# EAGLE board povsheild4x8 (EAGLE 6.5.0), part 1 of 6
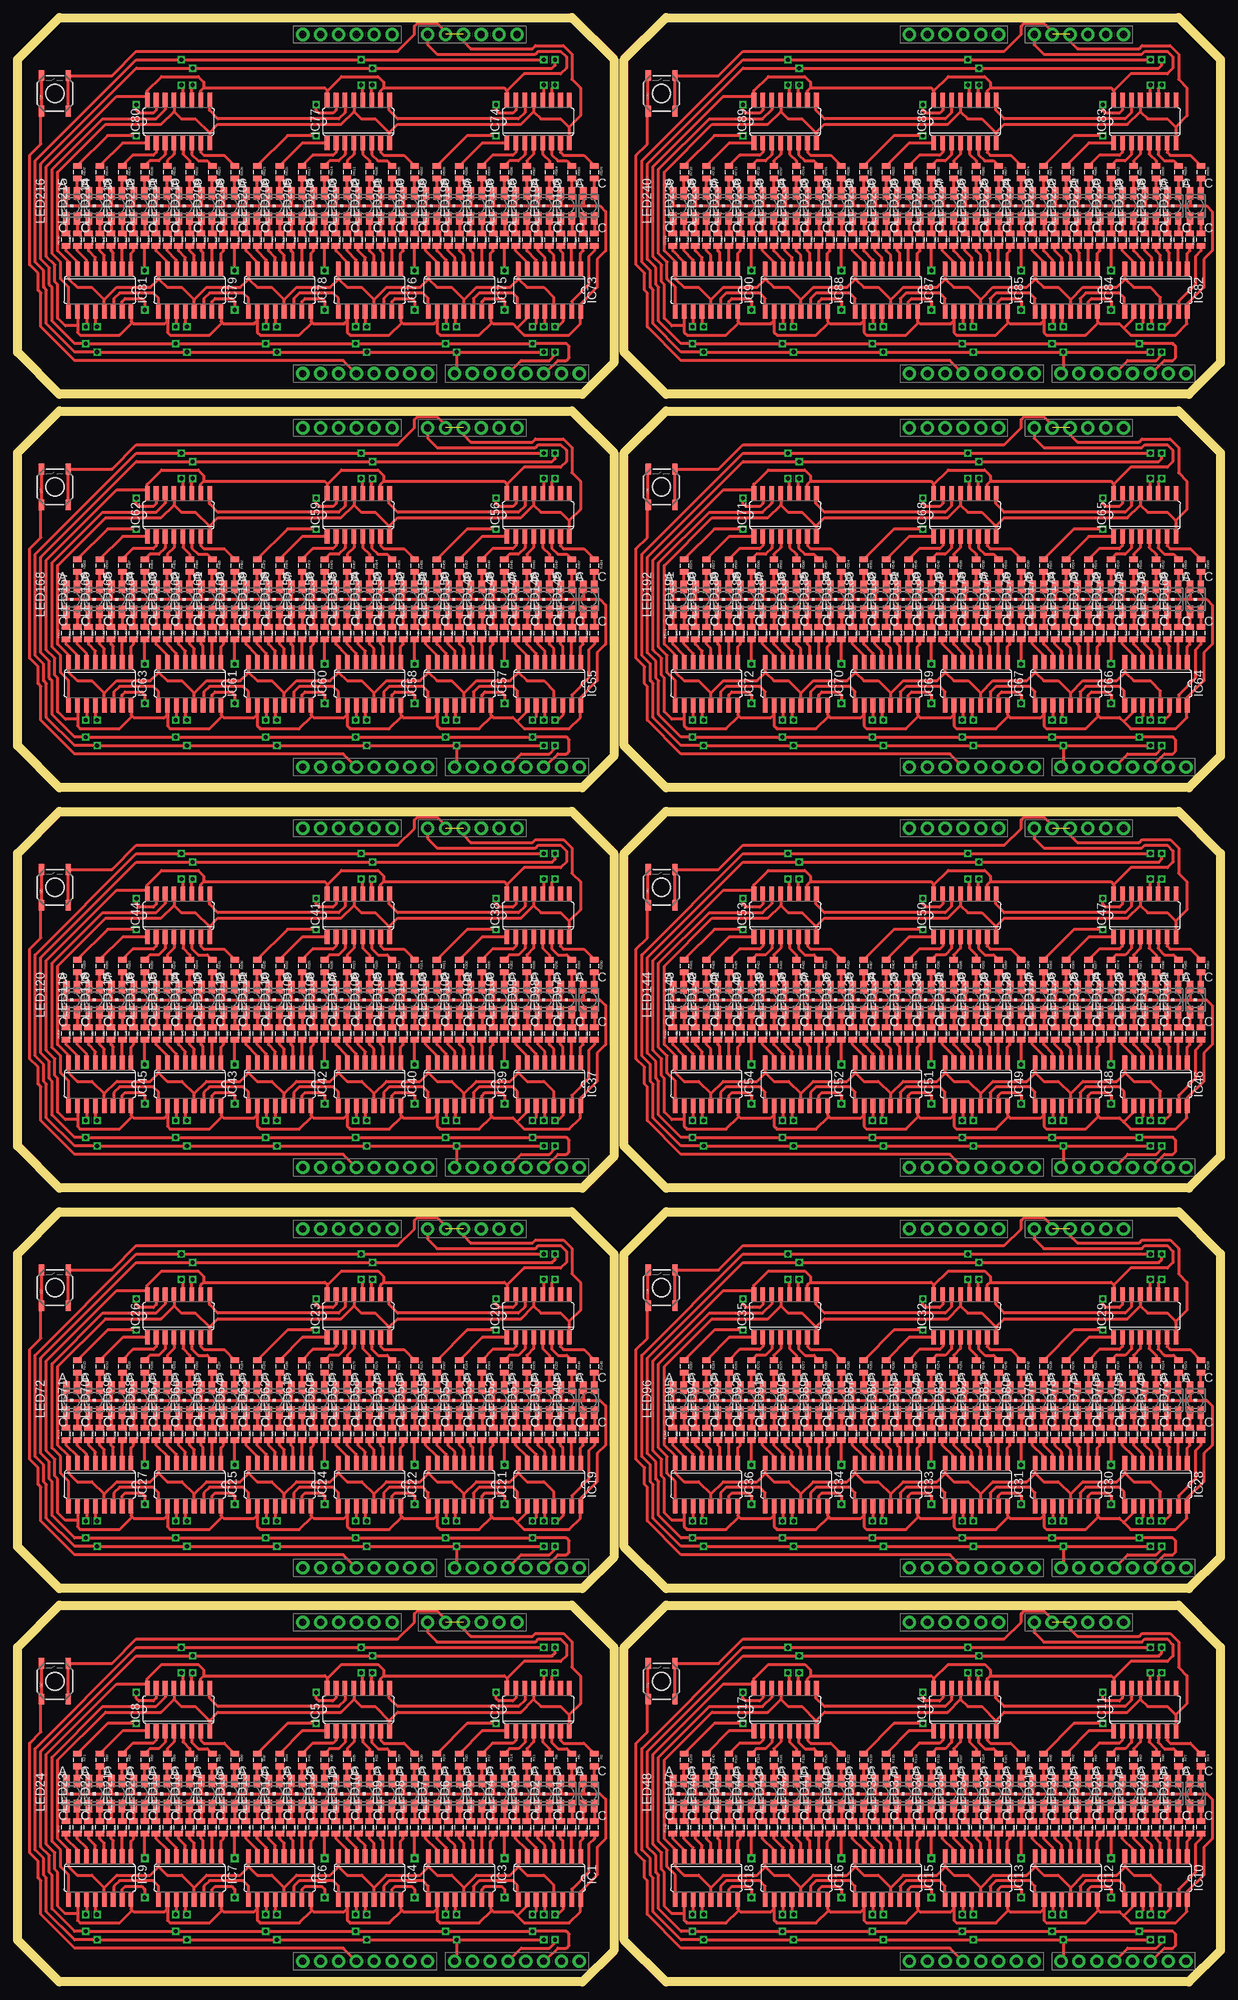
[diagram p0: board, top side]
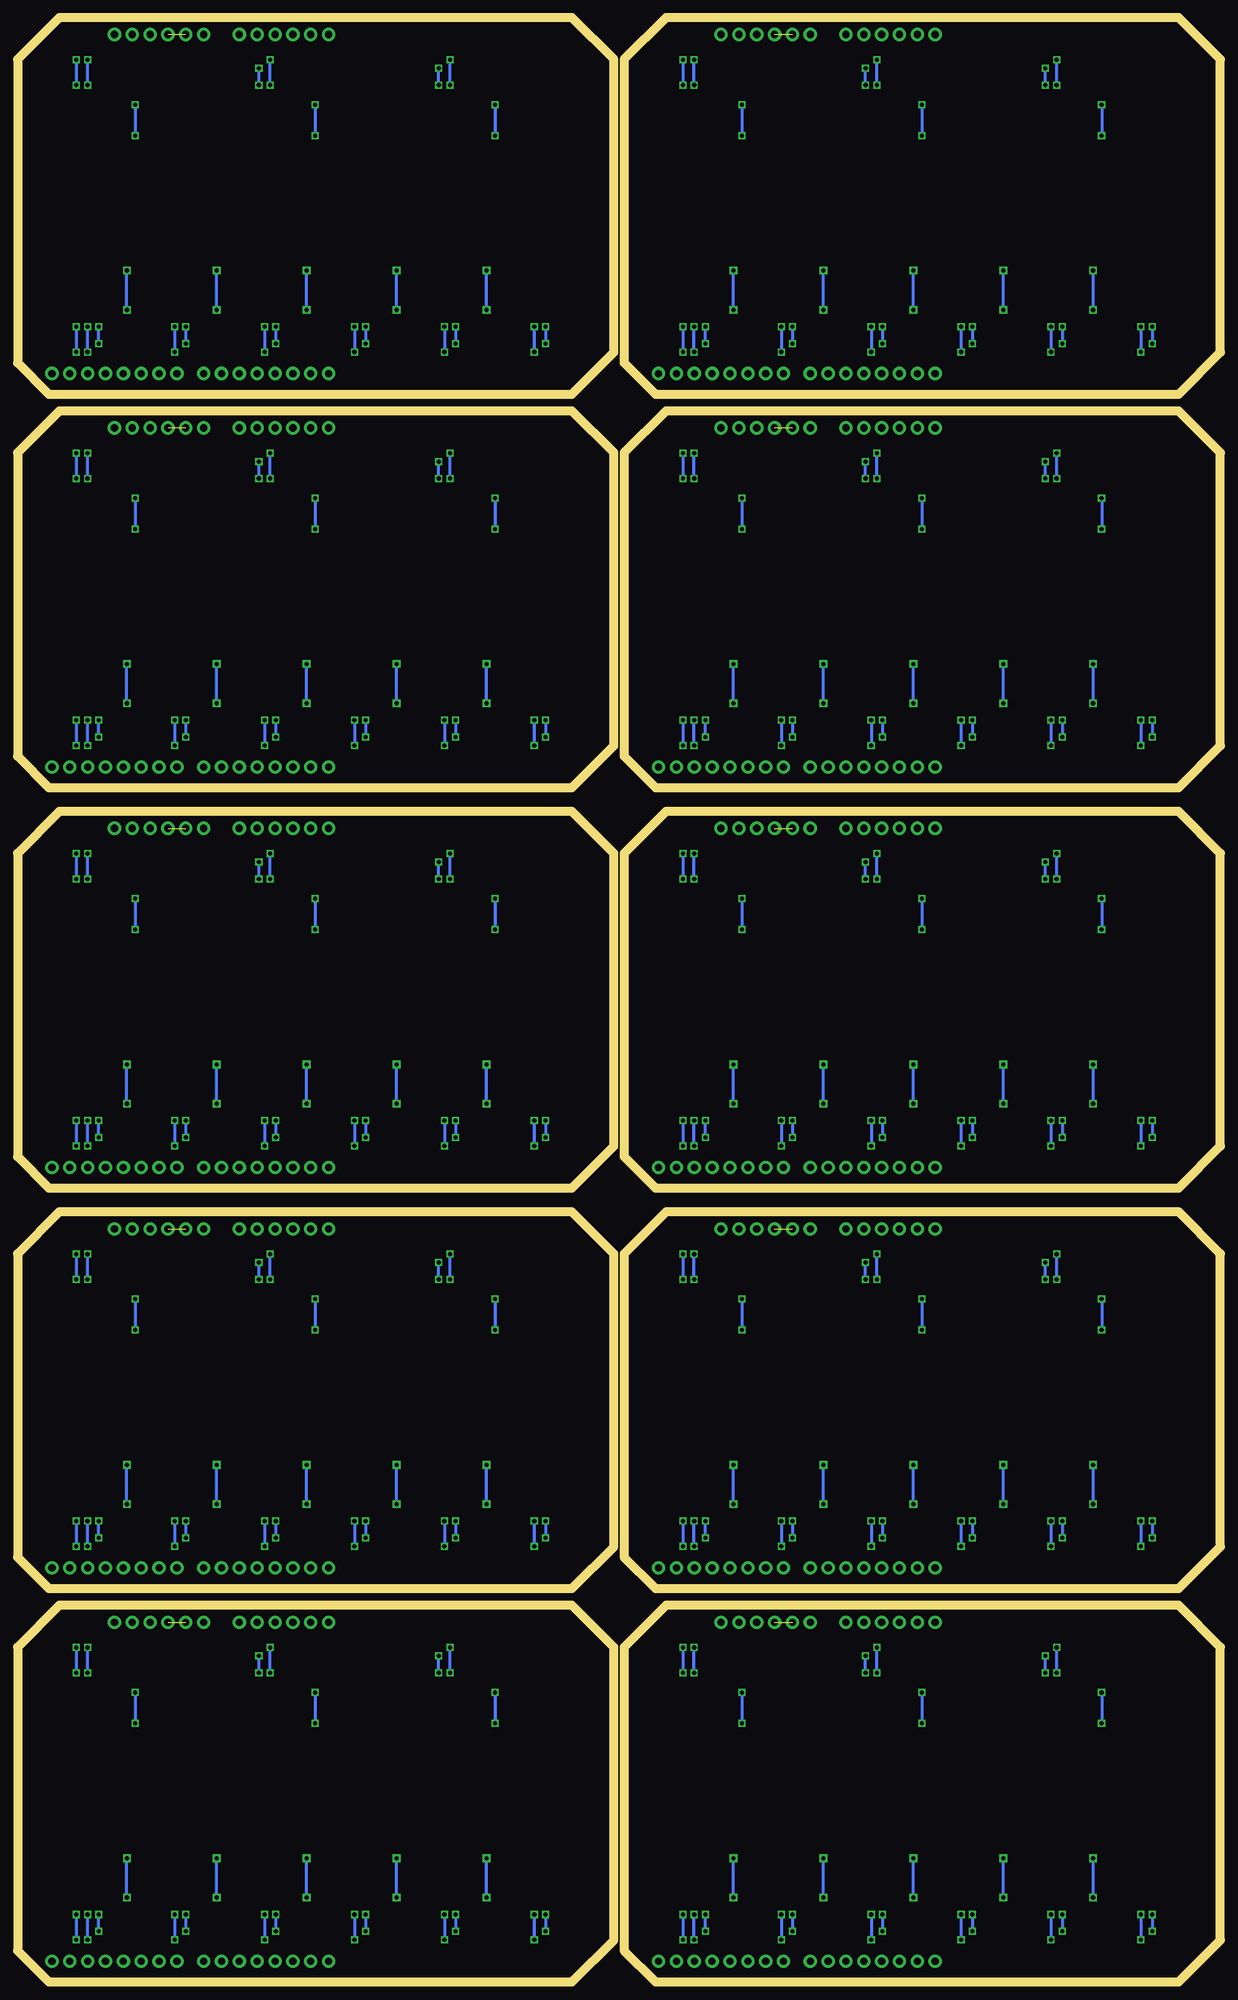
[diagram p1: board, bottom side, seen from below]

Size 171.23 x 279.6 mm. Coordinates in mm from the lower left corner, seen from the top.
Outline: 0,47.65 5.96,53.6 78.92,53.6 84.88,47.65 84.88,26.8 84.88,4.47 80.41,0 5.96,0 0,5.96 0,26.8 0,47.65
Outline: 86.36,47.65 92.32,53.6 165.28,53.6 171.23,47.65 171.23,26.8 171.23,4.47 166.77,0 92.32,0 86.36,5.96 86.36,26.8 86.36,47.65
Outline: 0,103.65 5.96,109.6 78.92,109.6 84.88,103.65 84.88,82.8 84.88,60.47 80.41,56 5.96,56 0,61.96 0,82.8 0,103.65
Outline: 86.36,103.65 92.32,109.6 165.28,109.6 171.23,103.65 171.23,82.8 171.23,60.47 166.77,56 92.32,56 86.36,61.96 86.36,82.8 86.36,103.65
Outline: 0,160.65 5.96,166.6 78.92,166.6 84.88,160.65 84.88,139.8 84.88,117.47 80.41,113 5.96,113 0,118.96 0,139.8 0,160.65
Outline: 86.36,160.65 92.32,166.6 165.28,166.6 171.23,160.65 171.23,139.8 171.23,117.47 166.77,113 92.32,113 86.36,118.96 86.36,139.8 86.36,160.65
Outline: 0,217.65 5.96,223.6 78.92,223.6 84.88,217.65 84.88,196.8 84.88,174.47 80.41,170 5.96,170 0,175.96 0,196.8 0,217.65
Outline: 86.36,217.65 92.32,223.6 165.28,223.6 171.23,217.65 171.23,196.8 171.23,174.47 166.77,170 92.32,170 86.36,175.96 86.36,196.8 86.36,217.65
Outline: 0,273.65 5.96,279.6 78.92,279.6 84.88,273.65 84.88,252.8 84.88,230.47 80.41,226 5.96,226 0,231.96 0,252.8 0,273.65
Outline: 86.36,273.65 92.32,279.6 165.28,279.6 171.23,273.65 171.23,252.8 171.23,230.47 166.77,226 92.32,226 86.36,231.96 86.36,252.8 86.36,273.65
Copper layers (1*16): Top 0.035mm / dielectric 1.5mm / Bottom 0.035mm
Design rules "default": minimum track width 10mil, minimum drill 24mil, track to track 8mil, track to pad 8mil, pad to pad 8mil, via to via 8mil, smd to smd 8mil, copper to edge 40mil, drill to drill 8mil, minimum pad ring 10mil, minimum via ring 8mil, stop-mask expansion 4mil, vias tented up to drill 0mil, thermal gap 10mil
Milling: 80 lines

## Footprints (pad centres in the part's own frame; a part is rotated, then mirrored left to right if it is on the bottom)
SO16 = smd 0.66 x 2.032: 1 -4.445,-3.073; 2 -3.175,-3.073; 3 -1.905,-3.073; 4 -0.635,-3.073; 5 0.635,-3.073; 6 1.905,-3.073; 7 3.175,-3.073; 8 4.445,-3.073; 9 4.445,3.073; 10 3.175,3.073; 11 1.905,3.073; 12 0.635,3.073; 13 -0.635,3.073; 14 -1.905,3.073; 15 -3.175,3.073; 16 -4.445,3.073
P-LCC-4 = smd 0.914 x 1.778: A -0.762,1.778; C@1 -0.762,-1.778; C@3 0.762,1.778; C@4 0.762,-1.778
0805 = smd 0.8 x 1.2: 1 -0.9,0; 2 0.9,0
TACTILE_SWITCH_SMD = smd 1.524 x 0.762: 1 -2.54,1.905; 2 2.54,1.905; 3 -2.54,-1.905; 4 2.54,-1.905
DUEMILANOVE_VIAS = drill 1.016 pad 1.88: 3.3V 50.8,13.97; 5V 50.8,16.51; A0 50.8,29.21; A1 50.8,31.75; A2 50.8,34.29; A3 50.8,36.83; A4 50.8,39.37; A5 50.8,41.91; AREF 2.54,2.54; D2 2.54,36.83; D3 2.54,34.29; D4 2.54,31.75; D5 2.54,29.21; D6 2.54,26.67; D7 2.54,24.13; D8 2.54,20.32; D9 2.54,17.78; D10 2.54,15.24; D11 2.54,12.7; D12 2.54,10.16; D13 2.54,7.62; GND@0 50.8,19.05; GND@1 50.8,21.59; GND@2 2.54,5.08; RES 50.8,11.43; RX 2.54,41.91; TX 2.54,39.37; VIN 50.8,24.13

## Placement (x,y rotation side)
IC1  74HC595D  [SO16]  75.72,14.8 180 top
IC2  74HC595D  [SO16]  74.12,38.8 0 top
IC3  74HC595D  [SO16]  62.91,14.8 180 top
IC4  74HC595D  [SO16]  50.11,14.8 180 top
IC5  74HC595D  [SO16]  48.51,38.8 0 top
IC6  74HC595D  [SO16]  37.31,14.8 180 top
IC7  74HC595D  [SO16]  24.52,14.8 180 top
IC8  74HC595D  [SO16]  22.91,38.8 0 top
IC9  74HC595D  [SO16]  11.71,14.8 180 top
IC10  74HC595D  [SO16]  162.07,14.8 180 top
IC11  74HC595D  [SO16]  160.47,38.8 0 top
IC12  74HC595D  [SO16]  149.27,14.8 180 top
IC13  74HC595D  [SO16]  136.47,14.8 180 top
IC14  74HC595D  [SO16]  134.88,38.8 0 top
IC15  74HC595D  [SO16]  123.67,14.8 180 top
IC16  74HC595D  [SO16]  110.88,14.8 180 top
IC17  74HC595D  [SO16]  109.28,38.8 0 top
IC18  74HC595D  [SO16]  98.08,14.8 180 top
IC19  74HC595D  [SO16]  75.72,70.8 180 top
IC20  74HC595D  [SO16]  74.12,94.8 0 top
IC21  74HC595D  [SO16]  62.91,70.8 180 top
IC22  74HC595D  [SO16]  50.11,70.8 180 top
IC23  74HC595D  [SO16]  48.51,94.8 0 top
IC24  74HC595D  [SO16]  37.31,70.8 180 top
IC25  74HC595D  [SO16]  24.52,70.8 180 top
IC26  74HC595D  [SO16]  22.91,94.8 0 top
IC27  74HC595D  [SO16]  11.71,70.8 180 top
IC28  74HC595D  [SO16]  162.07,70.8 180 top
IC29  74HC595D  [SO16]  160.47,94.8 0 top
IC30  74HC595D  [SO16]  149.27,70.8 180 top
IC31  74HC595D  [SO16]  136.47,70.8 180 top
IC32  74HC595D  [SO16]  134.88,94.8 0 top
IC33  74HC595D  [SO16]  123.67,70.8 180 top
IC34  74HC595D  [SO16]  110.88,70.8 180 top
IC35  74HC595D  [SO16]  109.28,94.8 0 top
IC36  74HC595D  [SO16]  98.08,70.8 180 top
IC37  74HC595D  [SO16]  75.72,127.8 180 top
IC38  74HC595D  [SO16]  74.12,151.8 0 top
IC39  74HC595D  [SO16]  62.91,127.8 180 top
IC40  74HC595D  [SO16]  50.11,127.8 180 top
IC41  74HC595D  [SO16]  48.51,151.8 0 top
IC42  74HC595D  [SO16]  37.31,127.8 180 top
IC43  74HC595D  [SO16]  24.52,127.8 180 top
IC44  74HC595D  [SO16]  22.91,151.8 0 top
IC45  74HC595D  [SO16]  11.71,127.8 180 top
IC46  74HC595D  [SO16]  162.07,127.8 180 top
IC47  74HC595D  [SO16]  160.47,151.8 0 top
IC48  74HC595D  [SO16]  149.27,127.8 180 top
IC49  74HC595D  [SO16]  136.47,127.8 180 top
IC50  74HC595D  [SO16]  134.88,151.8 0 top
IC51  74HC595D  [SO16]  123.67,127.8 180 top
IC52  74HC595D  [SO16]  110.88,127.8 180 top
IC53  74HC595D  [SO16]  109.28,151.8 0 top
IC54  74HC595D  [SO16]  98.08,127.8 180 top
IC55  74HC595D  [SO16]  75.72,184.8 180 top
IC56  74HC595D  [SO16]  74.12,208.8 0 top
IC57  74HC595D  [SO16]  62.91,184.8 180 top
IC58  74HC595D  [SO16]  50.11,184.8 180 top
IC59  74HC595D  [SO16]  48.51,208.8 0 top
IC60  74HC595D  [SO16]  37.31,184.8 180 top
IC61  74HC595D  [SO16]  24.52,184.8 180 top
IC62  74HC595D  [SO16]  22.91,208.8 0 top
IC63  74HC595D  [SO16]  11.71,184.8 180 top
IC64  74HC595D  [SO16]  162.07,184.8 180 top
IC65  74HC595D  [SO16]  160.47,208.8 0 top
IC66  74HC595D  [SO16]  149.27,184.8 180 top
IC67  74HC595D  [SO16]  136.47,184.8 180 top
IC68  74HC595D  [SO16]  134.88,208.8 0 top
IC69  74HC595D  [SO16]  123.67,184.8 180 top
IC70  74HC595D  [SO16]  110.88,184.8 180 top
IC71  74HC595D  [SO16]  109.28,208.8 0 top
IC72  74HC595D  [SO16]  98.08,184.8 180 top
IC73  74HC595D  [SO16]  75.72,240.8 180 top
IC74  74HC595D  [SO16]  74.12,264.8 0 top
IC75  74HC595D  [SO16]  62.91,240.8 180 top
IC76  74HC595D  [SO16]  50.11,240.8 180 top
IC77  74HC595D  [SO16]  48.51,264.8 0 top
IC78  74HC595D  [SO16]  37.31,240.8 180 top
IC79  74HC595D  [SO16]  24.52,240.8 180 top
IC80  74HC595D  [SO16]  22.91,264.8 0 top
IC81  74HC595D  [SO16]  11.71,240.8 180 top
IC82  74HC595D  [SO16]  162.07,240.8 180 top
IC83  74HC595D  [SO16]  160.47,264.8 0 top
IC84  74HC595D  [SO16]  149.27,240.8 180 top
IC85  74HC595D  [SO16]  136.47,240.8 180 top
IC86  74HC595D  [SO16]  134.88,264.8 0 top
IC87  74HC595D  [SO16]  123.67,240.8 180 top
IC88  74HC595D  [SO16]  110.88,240.8 180 top
IC89  74HC595D  [SO16]  109.28,264.8 0 top
IC90  74HC595D  [SO16]  98.08,240.8 180 top
LED1  [P-LCC-4]  81.31,26.8 0 top
LED2  [P-LCC-4]  78.12,26.8 0 top
LED3  [P-LCC-4]  74.92,26.8 0 top
LED4  [P-LCC-4]  71.72,26.8 0 top
LED5  [P-LCC-4]  68.52,26.8 0 top
LED6  [P-LCC-4]  65.31,26.8 0 top
LED7  [P-LCC-4]  62.11,26.8 0 top
LED8  [P-LCC-4]  58.91,26.8 0 top
LED9  [P-LCC-4]  55.71,26.8 0 top
LED10  [P-LCC-4]  52.51,26.8 0 top
LED11  [P-LCC-4]  49.31,26.8 0 top
LED12  [P-LCC-4]  46.11,26.8 0 top
LED13  [P-LCC-4]  42.91,26.8 0 top
LED14  [P-LCC-4]  39.71,26.8 0 top
LED15  [P-LCC-4]  36.51,26.8 0 top
LED16  [P-LCC-4]  33.31,26.8 0 top
LED17  [P-LCC-4]  30.12,26.8 0 top
LED18  [P-LCC-4]  26.91,26.8 0 top
LED19  [P-LCC-4]  23.71,26.8 0 top
LED20  [P-LCC-4]  20.52,26.8 0 top
LED21  [P-LCC-4]  17.32,26.8 0 top
LED22  [P-LCC-4]  14.12,26.8 0 top
LED23  [P-LCC-4]  10.92,26.8 0 top
LED24  [P-LCC-4]  7.71,26.8 0 top
LED25  [P-LCC-4]  167.67,26.8 0 top
LED26  [P-LCC-4]  164.47,26.8 0 top
LED27  [P-LCC-4]  161.27,26.8 0 top
LED28  [P-LCC-4]  158.07,26.8 0 top
LED29  [P-LCC-4]  154.88,26.8 0 top
LED30  [P-LCC-4]  151.67,26.8 0 top
LED31  [P-LCC-4]  148.47,26.8 0 top
LED32  [P-LCC-4]  145.27,26.8 0 top
LED33  [P-LCC-4]  142.07,26.8 0 top
LED34  [P-LCC-4]  138.88,26.8 0 top
LED35  [P-LCC-4]  135.67,26.8 0 top
LED36  [P-LCC-4]  132.47,26.8 0 top
LED37  [P-LCC-4]  129.27,26.8 0 top
LED38  [P-LCC-4]  126.08,26.8 0 top
LED39  [P-LCC-4]  122.88,26.8 0 top
LED40  [P-LCC-4]  119.67,26.8 0 top
LED41  [P-LCC-4]  116.48,26.8 0 top
LED42  [P-LCC-4]  113.28,26.8 0 top
LED43  [P-LCC-4]  110.08,26.8 0 top
LED44  [P-LCC-4]  106.88,26.8 0 top
LED45  [P-LCC-4]  103.67,26.8 0 top
LED46  [P-LCC-4]  100.48,26.8 0 top
LED47  [P-LCC-4]  97.28,26.8 0 top
LED48  [P-LCC-4]  94.08,26.8 0 top
LED49  [P-LCC-4]  81.31,82.8 0 top
LED50  [P-LCC-4]  78.12,82.8 0 top
LED51  [P-LCC-4]  74.92,82.8 0 top
LED52  [P-LCC-4]  71.72,82.8 0 top
LED53  [P-LCC-4]  68.52,82.8 0 top
LED54  [P-LCC-4]  65.31,82.8 0 top
LED55  [P-LCC-4]  62.11,82.8 0 top
LED56  [P-LCC-4]  58.91,82.8 0 top
LED57  [P-LCC-4]  55.71,82.8 0 top
LED58  [P-LCC-4]  52.51,82.8 0 top
LED59  [P-LCC-4]  49.31,82.8 0 top
LED60  [P-LCC-4]  46.11,82.8 0 top
LED61  [P-LCC-4]  42.91,82.8 0 top
LED62  [P-LCC-4]  39.71,82.8 0 top
LED63  [P-LCC-4]  36.51,82.8 0 top
LED64  [P-LCC-4]  33.31,82.8 0 top
LED65  [P-LCC-4]  30.12,82.8 0 top
LED66  [P-LCC-4]  26.91,82.8 0 top
LED67  [P-LCC-4]  23.71,82.8 0 top
LED68  [P-LCC-4]  20.52,82.8 0 top
LED69  [P-LCC-4]  17.32,82.8 0 top
LED70  [P-LCC-4]  14.12,82.8 0 top
LED71  [P-LCC-4]  10.92,82.8 0 top
LED72  [P-LCC-4]  7.71,82.8 0 top
LED73  [P-LCC-4]  167.67,82.8 0 top
LED74  [P-LCC-4]  164.47,82.8 0 top
LED75  [P-LCC-4]  161.27,82.8 0 top
LED76  [P-LCC-4]  158.07,82.8 0 top
LED77  [P-LCC-4]  154.88,82.8 0 top
LED78  [P-LCC-4]  151.67,82.8 0 top
LED79  [P-LCC-4]  148.47,82.8 0 top
LED80  [P-LCC-4]  145.27,82.8 0 top
LED81  [P-LCC-4]  142.07,82.8 0 top
LED82  [P-LCC-4]  138.88,82.8 0 top
LED83  [P-LCC-4]  135.67,82.8 0 top
LED84  [P-LCC-4]  132.47,82.8 0 top
LED85  [P-LCC-4]  129.27,82.8 0 top
LED86  [P-LCC-4]  126.08,82.8 0 top
LED87  [P-LCC-4]  122.88,82.8 0 top
LED88  [P-LCC-4]  119.67,82.8 0 top
LED89  [P-LCC-4]  116.48,82.8 0 top
LED90  [P-LCC-4]  113.28,82.8 0 top
LED91  [P-LCC-4]  110.08,82.8 0 top
LED92  [P-LCC-4]  106.88,82.8 0 top
LED93  [P-LCC-4]  103.67,82.8 0 top
LED94  [P-LCC-4]  100.48,82.8 0 top
LED95  [P-LCC-4]  97.28,82.8 0 top
LED96  [P-LCC-4]  94.08,82.8 0 top
LED97  [P-LCC-4]  81.31,139.8 0 top
LED98  [P-LCC-4]  78.12,139.8 0 top
LED99  [P-LCC-4]  74.92,139.8 0 top
LED100  [P-LCC-4]  71.72,139.8 0 top
LED101  [P-LCC-4]  68.52,139.8 0 top
LED102  [P-LCC-4]  65.31,139.8 0 top
LED103  [P-LCC-4]  62.11,139.8 0 top
LED104  [P-LCC-4]  58.91,139.8 0 top
LED105  [P-LCC-4]  55.71,139.8 0 top
LED106  [P-LCC-4]  52.51,139.8 0 top
LED107  [P-LCC-4]  49.31,139.8 0 top
LED108  [P-LCC-4]  46.11,139.8 0 top
LED109  [P-LCC-4]  42.91,139.8 0 top
LED110  [P-LCC-4]  39.71,139.8 0 top
LED111  [P-LCC-4]  36.51,139.8 0 top
LED112  [P-LCC-4]  33.31,139.8 0 top
LED113  [P-LCC-4]  30.12,139.8 0 top
LED114  [P-LCC-4]  26.91,139.8 0 top
LED115  [P-LCC-4]  23.71,139.8 0 top
LED116  [P-LCC-4]  20.52,139.8 0 top
LED117  [P-LCC-4]  17.32,139.8 0 top
LED118  [P-LCC-4]  14.12,139.8 0 top
LED119  [P-LCC-4]  10.92,139.8 0 top
LED120  [P-LCC-4]  7.71,139.8 0 top
LED121  [P-LCC-4]  167.67,139.8 0 top
LED122  [P-LCC-4]  164.47,139.8 0 top
LED123  [P-LCC-4]  161.27,139.8 0 top
LED124  [P-LCC-4]  158.07,139.8 0 top
LED125  [P-LCC-4]  154.88,139.8 0 top
LED126  [P-LCC-4]  151.67,139.8 0 top
LED127  [P-LCC-4]  148.47,139.8 0 top
LED128  [P-LCC-4]  145.27,139.8 0 top
LED129  [P-LCC-4]  142.07,139.8 0 top
LED130  [P-LCC-4]  138.88,139.8 0 top
LED131  [P-LCC-4]  135.67,139.8 0 top
LED132  [P-LCC-4]  132.47,139.8 0 top
LED133  [P-LCC-4]  129.27,139.8 0 top
LED134  [P-LCC-4]  126.08,139.8 0 top
LED135  [P-LCC-4]  122.88,139.8 0 top
LED136  [P-LCC-4]  119.67,139.8 0 top
LED137  [P-LCC-4]  116.48,139.8 0 top
LED138  [P-LCC-4]  113.28,139.8 0 top
LED139  [P-LCC-4]  110.08,139.8 0 top
LED140  [P-LCC-4]  106.88,139.8 0 top
LED141  [P-LCC-4]  103.67,139.8 0 top
LED142  [P-LCC-4]  100.48,139.8 0 top
LED143  [P-LCC-4]  97.28,139.8 0 top
LED144  [P-LCC-4]  94.08,139.8 0 top
LED145  [P-LCC-4]  81.31,196.8 0 top
LED146  [P-LCC-4]  78.12,196.8 0 top
LED147  [P-LCC-4]  74.92,196.8 0 top
LED148  [P-LCC-4]  71.72,196.8 0 top
LED149  [P-LCC-4]  68.52,196.8 0 top
LED150  [P-LCC-4]  65.31,196.8 0 top
LED151  [P-LCC-4]  62.11,196.8 0 top
LED152  [P-LCC-4]  58.91,196.8 0 top
LED153  [P-LCC-4]  55.71,196.8 0 top
LED154  [P-LCC-4]  52.51,196.8 0 top
LED155  [P-LCC-4]  49.31,196.8 0 top
LED156  [P-LCC-4]  46.11,196.8 0 top
LED157  [P-LCC-4]  42.91,196.8 0 top
LED158  [P-LCC-4]  39.71,196.8 0 top
LED159  [P-LCC-4]  36.51,196.8 0 top
LED160  [P-LCC-4]  33.31,196.8 0 top
LED161  [P-LCC-4]  30.12,196.8 0 top
LED162  [P-LCC-4]  26.91,196.8 0 top
LED163  [P-LCC-4]  23.71,196.8 0 top
LED164  [P-LCC-4]  20.52,196.8 0 top
LED165  [P-LCC-4]  17.32,196.8 0 top
LED166  [P-LCC-4]  14.12,196.8 0 top
LED167  [P-LCC-4]  10.92,196.8 0 top
LED168  [P-LCC-4]  7.71,196.8 0 top
LED169  [P-LCC-4]  167.67,196.8 0 top
LED170  [P-LCC-4]  164.47,196.8 0 top
LED171  [P-LCC-4]  161.27,196.8 0 top
LED172  [P-LCC-4]  158.07,196.8 0 top
LED173  [P-LCC-4]  154.88,196.8 0 top
LED174  [P-LCC-4]  151.67,196.8 0 top
LED175  [P-LCC-4]  148.47,196.8 0 top
LED176  [P-LCC-4]  145.27,196.8 0 top
LED177  [P-LCC-4]  142.07,196.8 0 top
LED178  [P-LCC-4]  138.88,196.8 0 top
LED179  [P-LCC-4]  135.67,196.8 0 top
LED180  [P-LCC-4]  132.47,196.8 0 top
LED181  [P-LCC-4]  129.27,196.8 0 top
LED182  [P-LCC-4]  126.08,196.8 0 top
LED183  [P-LCC-4]  122.88,196.8 0 top
LED184  [P-LCC-4]  119.67,196.8 0 top
LED185  [P-LCC-4]  116.48,196.8 0 top
LED186  [P-LCC-4]  113.28,196.8 0 top
LED187  [P-LCC-4]  110.08,196.8 0 top
LED188  [P-LCC-4]  106.88,196.8 0 top
LED189  [P-LCC-4]  103.67,196.8 0 top
LED190  [P-LCC-4]  100.48,196.8 0 top
LED191  [P-LCC-4]  97.28,196.8 0 top
LED192  [P-LCC-4]  94.08,196.8 0 top
LED193  [P-LCC-4]  81.31,252.8 0 top
LED194  [P-LCC-4]  78.12,252.8 0 top
LED195  [P-LCC-4]  74.92,252.8 0 top
LED196  [P-LCC-4]  71.72,252.8 0 top
LED197  [P-LCC-4]  68.52,252.8 0 top
LED198  [P-LCC-4]  65.31,252.8 0 top
LED199  [P-LCC-4]  62.11,252.8 0 top
LED200  [P-LCC-4]  58.91,252.8 0 top
LED201  [P-LCC-4]  55.71,252.8 0 top
LED202  [P-LCC-4]  52.51,252.8 0 top
LED203  [P-LCC-4]  49.31,252.8 0 top
LED204  [P-LCC-4]  46.11,252.8 0 top
LED205  [P-LCC-4]  42.91,252.8 0 top
LED206  [P-LCC-4]  39.71,252.8 0 top
LED207  [P-LCC-4]  36.51,252.8 0 top
LED208  [P-LCC-4]  33.31,252.8 0 top
LED209  [P-LCC-4]  30.12,252.8 0 top
LED210  [P-LCC-4]  26.91,252.8 0 top
LED211  [P-LCC-4]  23.71,252.8 0 top
LED212  [P-LCC-4]  20.52,252.8 0 top
LED213  [P-LCC-4]  17.32,252.8 0 top
LED214  [P-LCC-4]  14.12,252.8 0 top
LED215  [P-LCC-4]  10.92,252.8 0 top
LED216  [P-LCC-4]  7.71,252.8 0 top
LED217  [P-LCC-4]  167.67,252.8 0 top
LED218  [P-LCC-4]  164.47,252.8 0 top
LED219  [P-LCC-4]  161.27,252.8 0 top
LED220  [P-LCC-4]  158.07,252.8 0 top
LED221  [P-LCC-4]  154.88,252.8 0 top
LED222  [P-LCC-4]  151.67,252.8 0 top
LED223  [P-LCC-4]  148.47,252.8 0 top
LED224  [P-LCC-4]  145.27,252.8 0 top
LED225  [P-LCC-4]  142.07,252.8 0 top
LED226  [P-LCC-4]  138.88,252.8 0 top
LED227  [P-LCC-4]  135.67,252.8 0 top
LED228  [P-LCC-4]  132.47,252.8 0 top
LED229  [P-LCC-4]  129.27,252.8 0 top
LED230  [P-LCC-4]  126.08,252.8 0 top
LED231  [P-LCC-4]  122.88,252.8 0 top
LED232  [P-LCC-4]  119.67,252.8 0 top
LED233  [P-LCC-4]  116.48,252.8 0 top
LED234  [P-LCC-4]  113.28,252.8 0 top
LED235  [P-LCC-4]  110.08,252.8 0 top
LED236  [P-LCC-4]  106.88,252.8 0 top
LED237  [P-LCC-4]  103.67,252.8 0 top
LED238  [P-LCC-4]  100.48,252.8 0 top
LED239  [P-LCC-4]  97.28,252.8 0 top
LED240  [P-LCC-4]  94.08,252.8 0 top
R1  [0805]  80.52,22 90 top
R2  [0805]  82.12,31.6 270 top
R3  [0805]  82.12,22 90 top
R4  [0805]  77.31,22 90 top
R5  [0805]  78.92,31.6 270 top
R6  [0805]  78.92,22 90 top
R7  [0805]  74.12,22 90 top
R8  [0805]  75.72,31.6 270 top
R9  [0805]  75.72,22 90 top
R10  [0805]  70.92,22 90 top
R11  [0805]  72.52,31.6 270 top
R12  [0805]  72.52,22 90 top
R13  [0805]  67.72,22 90 top
R14  [0805]  69.31,31.6 270 top
R15  [0805]  69.31,22 90 top
R16  [0805]  64.52,22 90 top
R17  [0805]  66.12,31.6 270 top
R18  [0805]  66.12,22 90 top
R19  [0805]  61.31,22 90 top
R20  [0805]  62.91,31.6 270 top
R21  [0805]  62.91,22 90 top
R22  [0805]  58.11,22 90 top
R23  [0805]  59.71,31.6 270 top
R24  [0805]  59.71,22 90 top
R25  [0805]  54.91,22 90 top
R26  [0805]  56.51,31.6 270 top
R27  [0805]  56.51,22 90 top
R28  [0805]  51.71,22 90 top
R29  [0805]  53.31,31.6 270 top
R30  [0805]  53.31,22 90 top
R31  [0805]  48.51,22 90 top
R32  [0805]  50.11,31.6 270 top
R33  [0805]  50.11,22 90 top
R34  [0805]  45.31,22 90 top
R35  [0805]  46.91,31.6 270 top
R36  [0805]  46.91,22 90 top
R37  [0805]  42.11,22 90 top
R38  [0805]  43.71,31.6 270 top
R39  [0805]  43.71,22 90 top
R40  [0805]  38.91,22 90 top
R41  [0805]  40.51,31.6 270 top
R42  [0805]  40.51,22 90 top
R43  [0805]  35.71,22 90 top
R44  [0805]  37.31,31.6 270 top
R45  [0805]  37.31,22 90 top
R46  [0805]  32.51,22 90 top
R47  [0805]  34.11,31.6 270 top
R48  [0805]  34.11,22 90 top
R49  [0805]  29.32,22 90 top
R50  [0805]  30.92,31.6 270 top
R51  [0805]  30.92,22 90 top
R52  [0805]  26.12,22 90 top
R53  [0805]  27.71,31.6 270 top
R54  [0805]  27.71,22 90 top
R55  [0805]  22.91,22 90 top
R56  [0805]  24.52,31.6 270 top
R57  [0805]  24.52,22 90 top
R58  [0805]  19.71,22 90 top
R59  [0805]  21.32,31.6 270 top
R60  [0805]  21.32,22 90 top
R61  [0805]  16.52,22 90 top
R62  [0805]  18.12,31.6 270 top
R63  [0805]  18.12,22 90 top
R64  [0805]  13.32,22 90 top
R65  [0805]  14.91,31.6 270 top
R66  [0805]  14.91,22 90 top
R67  [0805]  10.12,22 90 top
R68  [0805]  11.71,31.6 270 top
R69  [0805]  11.71,22 90 top
R70  [0805]  6.92,22 90 top
R71  [0805]  8.52,31.6 270 top
R72  [0805]  8.52,22 90 top
R73  [0805]  166.88,22 90 top
R74  [0805]  168.47,31.6 270 top
R75  [0805]  168.47,22 90 top
R76  [0805]  163.67,22 90 top
R77  [0805]  165.27,31.6 270 top
R78  [0805]  165.27,22 90 top
R79  [0805]  160.47,22 90 top
R80  [0805]  162.07,31.6 270 top
R81  [0805]  162.07,22 90 top
R82  [0805]  157.27,22 90 top
R83  [0805]  158.88,31.6 270 top
R84  [0805]  158.88,22 90 top
R85  [0805]  154.07,22 90 top
R86  [0805]  155.67,31.6 270 top
R87  [0805]  155.67,22 90 top
R88  [0805]  150.88,22 90 top
R89  [0805]  152.47,31.6 270 top
R90  [0805]  152.47,22 90 top
R91  [0805]  147.67,22 90 top
R92  [0805]  149.27,31.6 270 top
R93  [0805]  149.27,22 90 top
R94  [0805]  144.47,22 90 top
R95  [0805]  146.07,31.6 270 top
R96  [0805]  146.07,22 90 top
R97  [0805]  141.27,22 90 top
R98  [0805]  142.88,31.6 270 top
R99  [0805]  142.88,22 90 top
R100  [0805]  138.07,22 90 top
R101  [0805]  139.67,31.6 270 top
R102  [0805]  139.67,22 90 top
R103  [0805]  134.88,22 90 top
R104  [0805]  136.47,31.6 270 top
R105  [0805]  136.47,22 90 top
R106  [0805]  131.67,22 90 top
R107  [0805]  133.27,31.6 270 top
R108  [0805]  133.27,22 90 top
R109  [0805]  128.47,22 90 top
R110  [0805]  130.07,31.6 270 top
R111  [0805]  130.07,22 90 top
R112  [0805]  125.28,22 90 top
R113  [0805]  126.88,31.6 270 top
R114  [0805]  126.88,22 90 top
R115  [0805]  122.08,22 90 top
R116  [0805]  123.67,31.6 270 top
R117  [0805]  123.67,22 90 top
R118  [0805]  118.88,22 90 top
R119  [0805]  120.48,31.6 270 top
R120  [0805]  120.48,22 90 top
R121  [0805]  115.67,22 90 top
R122  [0805]  117.28,31.6 270 top
R123  [0805]  117.28,22 90 top
R124  [0805]  112.48,22 90 top
R125  [0805]  114.08,31.6 270 top
R126  [0805]  114.08,22 90 top
R127  [0805]  109.28,22 90 top
R128  [0805]  110.88,31.6 270 top
R129  [0805]  110.88,22 90 top
R130  [0805]  106.08,22 90 top
R131  [0805]  107.67,31.6 270 top
R132  [0805]  107.67,22 90 top
R133  [0805]  102.88,22 90 top
R134  [0805]  104.48,31.6 270 top
R135  [0805]  104.48,22 90 top
R136  [0805]  99.67,22 90 top
R137  [0805]  101.28,31.6 270 top
R138  [0805]  101.28,22 90 top
R139  [0805]  96.48,22 90 top
R140  [0805]  98.08,31.6 270 top
R141  [0805]  98.08,22 90 top
R142  [0805]  93.28,22 90 top
R143  [0805]  94.88,31.6 270 top
R144  [0805]  94.88,22 90 top
R145  [0805]  80.52,78 90 top
R146  [0805]  82.12,87.6 270 top
R147  [0805]  82.12,78 90 top
R148  [0805]  77.31,78 90 top
R149  [0805]  78.92,87.6 270 top
R150  [0805]  78.92,78 90 top
R151  [0805]  74.12,78 90 top
R152  [0805]  75.72,87.6 270 top
R153  [0805]  75.72,78 90 top
R154  [0805]  70.92,78 90 top
R155  [0805]  72.52,87.6 270 top
R156  [0805]  72.52,78 90 top
R157  [0805]  67.72,78 90 top
R158  [0805]  69.31,87.6 270 top
R159  [0805]  69.31,78 90 top
R160  [0805]  64.52,78 90 top
R161  [0805]  66.12,87.6 270 top
R162  [0805]  66.12,78 90 top
R163  [0805]  61.31,78 90 top
R164  [0805]  62.91,87.6 270 top
R165  [0805]  62.91,78 90 top
R166  [0805]  58.11,78 90 top
R167  [0805]  59.71,87.6 270 top
R168  [0805]  59.71,78 90 top
R169  [0805]  54.91,78 90 top
R170  [0805]  56.51,87.6 270 top
R171  [0805]  56.51,78 90 top
R172  [0805]  51.71,78 90 top
R173  [0805]  53.31,87.6 270 top
R174  [0805]  53.31,78 90 top
R175  [0805]  48.51,78 90 top
R176  [0805]  50.11,87.6 270 top
R177  [0805]  50.11,78 90 top
R178  [0805]  45.31,78 90 top
R179  [0805]  46.91,87.6 270 top
R180  [0805]  46.91,78 90 top
R181  [0805]  42.11,78 90 top
R182  [0805]  43.71,87.6 270 top
R183  [0805]  43.71,78 90 top
R184  [0805]  38.91,78 90 top
R185  [0805]  40.51,87.6 270 top
R186  [0805]  40.51,78 90 top
R187  [0805]  35.71,78 90 top
R188  [0805]  37.31,87.6 270 top
R189  [0805]  37.31,78 90 top
R190  [0805]  32.51,78 90 top
R191  [0805]  34.11,87.6 270 top
R192  [0805]  34.11,78 90 top
R193  [0805]  29.32,78 90 top
R194  [0805]  30.92,87.6 270 top
R195  [0805]  30.92,78 90 top
R196  [0805]  26.12,78 90 top
R197  [0805]  27.71,87.6 270 top
R198  [0805]  27.71,78 90 top
R199  [0805]  22.91,78 90 top
R200  [0805]  24.52,87.6 270 top
R201  [0805]  24.52,78 90 top
R202  [0805]  19.71,78 90 top
R203  [0805]  21.32,87.6 270 top
R204  [0805]  21.32,78 90 top
R205  [0805]  16.52,78 90 top
R206  [0805]  18.12,87.6 270 top
R207  [0805]  18.12,78 90 top
R208  [0805]  13.32,78 90 top
R209  [0805]  14.91,87.6 270 top
R210  [0805]  14.91,78 90 top
R211  [0805]  10.12,78 90 top
R212  [0805]  11.71,87.6 270 top
R213  [0805]  11.71,78 90 top
R214  [0805]  6.92,78 90 top
R215  [0805]  8.52,87.6 270 top
R216  [0805]  8.52,78 90 top
R217  [0805]  166.88,78 90 top
R218  [0805]  168.47,87.6 270 top
R219  [0805]  168.47,78 90 top
R220  [0805]  163.67,78 90 top
R221  [0805]  165.27,87.6 270 top
R222  [0805]  165.27,78 90 top
R223  [0805]  160.47,78 90 top
R224  [0805]  162.07,87.6 270 top
R225  [0805]  162.07,78 90 top
R226  [0805]  157.27,78 90 top
R227  [0805]  158.88,87.6 270 top
R228  [0805]  158.88,78 90 top
R229  [0805]  154.07,78 90 top
R230  [0805]  155.67,87.6 270 top
R231  [0805]  155.67,78 90 top
R232  [0805]  150.88,78 90 top
R233  [0805]  152.47,87.6 270 top
R234  [0805]  152.47,78 90 top
R235  [0805]  147.67,78 90 top
R236  [0805]  149.27,87.6 270 top
R237  [0805]  149.27,78 90 top
R238  [0805]  144.47,78 90 top
R239  [0805]  146.07,87.6 270 top
R240  [0805]  146.07,78 90 top
R241  [0805]  141.27,78 90 top
R242  [0805]  142.88,87.6 270 top
R243  [0805]  142.88,78 90 top
R244  [0805]  138.07,78 90 top
R245  [0805]  139.67,87.6 270 top
R246  [0805]  139.67,78 90 top
R247  [0805]  134.88,78 90 top
R248  [0805]  136.47,87.6 270 top
R249  [0805]  136.47,78 90 top
R250  [0805]  131.67,78 90 top
R251  [0805]  133.27,87.6 270 top
R252  [0805]  133.27,78 90 top
R253  [0805]  128.47,78 90 top
R254  [0805]  130.07,87.6 270 top
R255  [0805]  130.07,78 90 top
R256  [0805]  125.28,78 90 top
R257  [0805]  126.88,87.6 270 top
R258  [0805]  126.88,78 90 top
R259  [0805]  122.08,78 90 top
R260  [0805]  123.67,87.6 270 top
R261  [0805]  123.67,78 90 top
R262  [0805]  118.88,78 90 top
R263  [0805]  120.48,87.6 270 top
R264  [0805]  120.48,78 90 top
R265  [0805]  115.67,78 90 top
R266  [0805]  117.28,87.6 270 top
R267  [0805]  117.28,78 90 top
R268  [0805]  112.48,78 90 top
R269  [0805]  114.08,87.6 270 top
R270  [0805]  114.08,78 90 top
R271  [0805]  109.28,78 90 top
R272  [0805]  110.88,87.6 270 top
R273  [0805]  110.88,78 90 top
R274  [0805]  106.08,78 90 top
R275  [0805]  107.67,87.6 270 top
R276  [0805]  107.67,78 90 top
R277  [0805]  102.88,78 90 top
R278  [0805]  104.48,87.6 270 top
R279  [0805]  104.48,78 90 top
R280  [0805]  99.67,78 90 top
R281  [0805]  101.28,87.6 270 top
R282  [0805]  101.28,78 90 top
R283  [0805]  96.48,78 90 top
R284  [0805]  98.08,87.6 270 top
R285  [0805]  98.08,78 90 top
R286  [0805]  93.28,78 90 top
R287  [0805]  94.88,87.6 270 top
R288  [0805]  94.88,78 90 top
R289  [0805]  80.52,135 90 top
R290  [0805]  82.12,144.6 270 top
R291  [0805]  82.12,135 90 top
R292  [0805]  77.31,135 90 top
R293  [0805]  78.92,144.6 270 top
R294  [0805]  78.92,135 90 top
R295  [0805]  74.12,135 90 top
R296  [0805]  75.72,144.6 270 top
R297  [0805]  75.72,135 90 top
R298  [0805]  70.92,135 90 top
R299  [0805]  72.52,144.6 270 top
R300  [0805]  72.52,135 90 top
R301  [0805]  67.72,135 90 top
R302  [0805]  69.31,144.6 270 top
R303  [0805]  69.31,135 90 top
R304  [0805]  64.52,135 90 top
R305  [0805]  66.12,144.6 270 top
R306  [0805]  66.12,135 90 top
R307  [0805]  61.31,135 90 top
R308  [0805]  62.91,144.6 270 top
R309  [0805]  62.91,135 90 top
R310  [0805]  58.11,135 90 top
R311  [0805]  59.71,144.6 270 top
R312  [0805]  59.71,135 90 top
R313  [0805]  54.91,135 90 top
R314  [0805]  56.51,144.6 270 top
R315  [0805]  56.51,135 90 top
R316  [0805]  51.71,135 90 top
R317  [0805]  53.31,144.6 270 top
R318  [0805]  53.31,135 90 top
R319  [0805]  48.51,135 90 top
R320  [0805]  50.11,144.6 270 top
R321  [0805]  50.11,135 90 top
R322  [0805]  45.31,135 90 top
R323  [0805]  46.91,144.6 270 top
R324  [0805]  46.91,135 90 top
R325  [0805]  42.11,135 90 top
R326  [0805]  43.71,144.6 270 top
R327  [0805]  43.71,135 90 top
R328  [0805]  38.91,135 90 top
R329  [0805]  40.51,144.6 270 top
R330  [0805]  40.51,135 90 top
R331  [0805]  35.71,135 90 top
R332  [0805]  37.31,144.6 270 top
R333  [0805]  37.31,135 90 top
R334  [0805]  32.51,135 90 top
R335  [0805]  34.11,144.6 270 top
R336  [0805]  34.11,135 90 top
R337  [0805]  29.32,135 90 top
R338  [0805]  30.92,144.6 270 top
R339  [0805]  30.92,135 90 top
R340  [0805]  26.12,135 90 top
R341  [0805]  27.71,144.6 270 top
R342  [0805]  27.71,135 90 top
R343  [0805]  22.91,135 90 top
R344  [0805]  24.52,144.6 270 top
R345  [0805]  24.52,135 90 top
R346  [0805]  19.71,135 90 top
R347  [0805]  21.32,144.6 270 top
R348  [0805]  21.32,135 90 top
R349  [0805]  16.52,135 90 top
R350  [0805]  18.12,144.6 270 top
R351  [0805]  18.12,135 90 top
R352  [0805]  13.32,135 90 top
R353  [0805]  14.91,144.6 270 top
R354  [0805]  14.91,135 90 top
R355  [0805]  10.12,135 90 top
R356  [0805]  11.71,144.6 270 top
R357  [0805]  11.71,135 90 top
R358  [0805]  6.92,135 90 top
R359  [0805]  8.52,144.6 270 top
R360  [0805]  8.52,135 90 top
R361  [0805]  166.88,135 90 top
R362  [0805]  168.47,144.6 270 top
R363  [0805]  168.47,135 90 top
R364  [0805]  163.67,135 90 top
R365  [0805]  165.27,144.6 270 top
R366  [0805]  165.27,135 90 top
R367  [0805]  160.47,135 90 top
R368  [0805]  162.07,144.6 270 top
R369  [0805]  162.07,135 90 top
R370  [0805]  157.27,135 90 top
R371  [0805]  158.88,144.6 270 top
R372  [0805]  158.88,135 90 top
R373  [0805]  154.07,135 90 top
R374  [0805]  155.67,144.6 270 top
R375  [0805]  155.67,135 90 top
R376  [0805]  150.88,135 90 top
R377  [0805]  152.47,144.6 270 top
R378  [0805]  152.47,135 90 top
R379  [0805]  147.67,135 90 top
R380  [0805]  149.27,144.6 270 top
R381  [0805]  149.27,135 90 top
R382  [0805]  144.47,135 90 top
R383  [0805]  146.07,144.6 270 top
R384  [0805]  146.07,135 90 top
R385  [0805]  141.27,135 90 top
R386  [0805]  142.88,144.6 270 top
R387  [0805]  142.88,135 90 top
R388  [0805]  138.07,135 90 top
R389  [0805]  139.67,144.6 270 top
R390  [0805]  139.67,135 90 top
R391  [0805]  134.88,135 90 top
R392  [0805]  136.47,144.6 270 top
R393  [0805]  136.47,135 90 top
R394  [0805]  131.67,135 90 top
R395  [0805]  133.27,144.6 270 top
R396  [0805]  133.27,135 90 top
R397  [0805]  128.47,135 90 top
R398  [0805]  130.07,144.6 270 top
R399  [0805]  130.07,135 90 top
R400  [0805]  125.28,135 90 top
R401  [0805]  126.88,144.6 270 top
R402  [0805]  126.88,135 90 top
R403  [0805]  122.08,135 90 top
R404  [0805]  123.67,144.6 270 top
R405  [0805]  123.67,135 90 top
R406  [0805]  118.88,135 90 top
R407  [0805]  120.48,144.6 270 top
R408  [0805]  120.48,135 90 top
R409  [0805]  115.67,135 90 top
R410  [0805]  117.28,144.6 270 top
R411  [0805]  117.28,135 90 top
R412  [0805]  112.48,135 90 top
R413  [0805]  114.08,144.6 270 top
R414  [0805]  114.08,135 90 top
R415  [0805]  109.28,135 90 top
R416  [0805]  110.88,144.6 270 top
R417  [0805]  110.88,135 90 top
R418  [0805]  106.08,135 90 top
R419  [0805]  107.67,144.6 270 top
R420  [0805]  107.67,135 90 top
R421  [0805]  102.88,135 90 top
R422  [0805]  104.48,144.6 270 top
R423  [0805]  104.48,135 90 top
R424  [0805]  99.67,135 90 top
R425  [0805]  101.28,144.6 270 top
R426  [0805]  101.28,135 90 top
R427  [0805]  96.48,135 90 top
R428  [0805]  98.08,144.6 270 top
R429  [0805]  98.08,135 90 top
R430  [0805]  93.28,135 90 top
R431  [0805]  94.88,144.6 270 top
R432  [0805]  94.88,135 90 top
R433  [0805]  80.52,192 90 top
R434  [0805]  82.12,201.6 270 top
R435  [0805]  82.12,192 90 top
R436  [0805]  77.31,192 90 top
R437  [0805]  78.92,201.6 270 top
R438  [0805]  78.92,192 90 top
R439  [0805]  74.12,192 90 top
R440  [0805]  75.72,201.6 270 top
R441  [0805]  75.72,192 90 top
R442  [0805]  70.92,192 90 top
R443  [0805]  72.52,201.6 270 top
R444  [0805]  72.52,192 90 top
R445  [0805]  67.72,192 90 top
R446  [0805]  69.31,201.6 270 top
R447  [0805]  69.31,192 90 top
R448  [0805]  64.52,192 90 top
R449  [0805]  66.12,201.6 270 top
R450  [0805]  66.12,192 90 top
R451  [0805]  61.31,192 90 top
R452  [0805]  62.91,201.6 270 top
R453  [0805]  62.91,192 90 top
R454  [0805]  58.11,192 90 top
R455  [0805]  59.71,201.6 270 top
R456  [0805]  59.71,192 90 top
R457  [0805]  54.91,192 90 top
R458  [0805]  56.51,201.6 270 top
R459  [0805]  56.51,192 90 top
R460  [0805]  51.71,192 90 top
R461  [0805]  53.31,201.6 270 top
R462  [0805]  53.31,192 90 top
R463  [0805]  48.51,192 90 top
R464  [0805]  50.11,201.6 270 top
R465  [0805]  50.11,192 90 top
R466  [0805]  45.31,192 90 top
R467  [0805]  46.91,201.6 270 top
R468  [0805]  46.91,192 90 top
R469  [0805]  42.11,192 90 top
R470  [0805]  43.71,201.6 270 top
R471  [0805]  43.71,192 90 top
R472  [0805]  38.91,192 90 top
R473  [0805]  40.51,201.6 270 top
R474  [0805]  40.51,192 90 top
R475  [0805]  35.71,192 90 top
R476  [0805]  37.31,201.6 270 top
R477  [0805]  37.31,192 90 top
R478  [0805]  32.51,192 90 top
R479  [0805]  34.11,201.6 270 top
R480  [0805]  34.11,192 90 top
R481  [0805]  29.32,192 90 top
R482  [0805]  30.92,201.6 270 top
R483  [0805]  30.92,192 90 top
R484  [0805]  26.12,192 90 top
R485  [0805]  27.71,201.6 270 top
R486  [0805]  27.71,192 90 top
R487  [0805]  22.91,192 90 top
R488  [0805]  24.52,201.6 270 top
R489  [0805]  24.52,192 90 top
R490  [0805]  19.71,192 90 top
R491  [0805]  21.32,201.6 270 top
R492  [0805]  21.32,192 90 top
R493  [0805]  16.52,192 90 top
R494  [0805]  18.12,201.6 270 top
R495  [0805]  18.12,192 90 top
R496  [0805]  13.32,192 90 top
R497  [0805]  14.91,201.6 270 top
R498  [0805]  14.91,192 90 top
R499  [0805]  10.12,192 90 top
R500  [0805]  11.71,201.6 270 top
R501  [0805]  11.71,192 90 top
R502  [0805]  6.92,192 90 top
R503  [0805]  8.52,201.6 270 top
R504  [0805]  8.52,192 90 top
R505  [0805]  166.88,192 90 top
R506  [0805]  168.47,201.6 270 top
R507  [0805]  168.47,192 90 top
R508  [0805]  163.67,192 90 top
R509  [0805]  165.27,201.6 270 top
R510  [0805]  165.27,192 90 top
R511  [0805]  160.47,192 90 top
R512  [0805]  162.07,201.6 270 top
R513  [0805]  162.07,192 90 top
R514  [0805]  157.27,192 90 top
R515  [0805]  158.88,201.6 270 top
R516  [0805]  158.88,192 90 top
R517  [0805]  154.07,192 90 top
R518  [0805]  155.67,201.6 270 top
R519  [0805]  155.67,192 90 top
R520  [0805]  150.88,192 90 top
R521  [0805]  152.47,201.6 270 top
R522  [0805]  152.47,192 90 top
R523  [0805]  147.67,192 90 top
R524  [0805]  149.27,201.6 270 top
R525  [0805]  149.27,192 90 top
R526  [0805]  144.47,192 90 top
R527  [0805]  146.07,201.6 270 top
R528  [0805]  146.07,192 90 top
R529  [0805]  141.27,192 90 top
R530  [0805]  142.88,201.6 270 top
R531  [0805]  142.88,192 90 top
R532  [0805]  138.07,192 90 top
R533  [0805]  139.67,201.6 270 top
R534  [0805]  139.67,192 90 top
R535  [0805]  134.88,192 90 top
R536  [0805]  136.47,201.6 270 top
R537  [0805]  136.47,192 90 top
R538  [0805]  131.67,192 90 top
R539  [0805]  133.27,201.6 270 top
R540  [0805]  133.27,192 90 top
R541  [0805]  128.47,192 90 top
R542  [0805]  130.07,201.6 270 top
R543  [0805]  130.07,192 90 top
R544  [0805]  125.28,192 90 top
R545  [0805]  126.88,201.6 270 top
R546  [0805]  126.88,192 90 top
R547  [0805]  122.08,192 90 top
R548  [0805]  123.67,201.6 270 top
R549  [0805]  123.67,192 90 top
R550  [0805]  118.88,192 90 top
R551  [0805]  120.48,201.6 270 top
R552  [0805]  120.48,192 90 top
R553  [0805]  115.67,192 90 top
R554  [0805]  117.28,201.6 270 top
R555  [0805]  117.28,192 90 top
R556  [0805]  112.48,192 90 top
R557  [0805]  114.08,201.6 270 top
R558  [0805]  114.08,192 90 top
R559  [0805]  109.28,192 90 top
R560  [0805]  110.88,201.6 270 top
R561  [0805]  110.88,192 90 top
R562  [0805]  106.08,192 90 top
R563  [0805]  107.67,201.6 270 top
R564  [0805]  107.67,192 90 top
R565  [0805]  102.88,192 90 top
R566  [0805]  104.48,201.6 270 top
R567  [0805]  104.48,192 90 top
R568  [0805]  99.67,192 90 top
R569  [0805]  101.28,201.6 270 top
R570  [0805]  101.28,192 90 top
R571  [0805]  96.48,192 90 top
R572  [0805]  98.08,201.6 270 top
R573  [0805]  98.08,192 90 top
R574  [0805]  93.28,192 90 top
R575  [0805]  94.88,201.6 270 top
R576  [0805]  94.88,192 90 top
R577  [0805]  80.52,248 90 top
R578  [0805]  82.12,257.6 270 top
R579  [0805]  82.12,248 90 top
R580  [0805]  77.31,248 90 top
R581  [0805]  78.92,257.6 270 top
R582  [0805]  78.92,248 90 top
R583  [0805]  74.12,248 90 top
R584  [0805]  75.72,257.6 270 top
R585  [0805]  75.72,248 90 top
R586  [0805]  70.92,248 90 top
R587  [0805]  72.52,257.6 270 top
R588  [0805]  72.52,248 90 top
R589  [0805]  67.72,248 90 top
R590  [0805]  69.31,257.6 270 top
R591  [0805]  69.31,248 90 top
R592  [0805]  64.52,248 90 top
R593  [0805]  66.12,257.6 270 top
R594  [0805]  66.12,248 90 top
R595  [0805]  61.31,248 90 top
R596  [0805]  62.91,257.6 270 top
R597  [0805]  62.91,248 90 top
R598  [0805]  58.11,248 90 top
R599  [0805]  59.71,257.6 270 top
R600  [0805]  59.71,248 90 top
R601  [0805]  54.91,248 90 top
R602  [0805]  56.51,257.6 270 top
R603  [0805]  56.51,248 90 top
R604  [0805]  51.71,248 90 top
R605  [0805]  53.31,257.6 270 top
R606  [0805]  53.31,248 90 top
R607  [0805]  48.51,248 90 top
R608  [0805]  50.11,257.6 270 top
R609  [0805]  50.11,248 90 top
R610  [0805]  45.31,248 90 top
R611  [0805]  46.91,257.6 270 top
R612  [0805]  46.91,248 90 top
R613  [0805]  42.11,248 90 top
R614  [0805]  43.71,257.6 270 top
R615  [0805]  43.71,248 90 top
R616  [0805]  38.91,248 90 top
R617  [0805]  40.51,257.6 270 top
R618  [0805]  40.51,248 90 top
R619  [0805]  35.71,248 90 top
R620  [0805]  37.31,257.6 270 top
R621  [0805]  37.31,248 90 top
R622  [0805]  32.51,248 90 top
R623  [0805]  34.11,257.6 270 top
R624  [0805]  34.11,248 90 top
R625  [0805]  29.32,248 90 top
R626  [0805]  30.92,257.6 270 top
R627  [0805]  30.92,248 90 top
R628  [0805]  26.12,248 90 top
R629  [0805]  27.71,257.6 270 top
R630  [0805]  27.71,248 90 top
R631  [0805]  22.91,248 90 top
R632  [0805]  24.52,257.6 270 top
R633  [0805]  24.52,248 90 top
R634  [0805]  19.71,248 90 top
R635  [0805]  21.32,257.6 270 top
R636  [0805]  21.32,248 90 top
R637  [0805]  16.52,248 90 top
R638  [0805]  18.12,257.6 270 top
R639  [0805]  18.12,248 90 top
R640  [0805]  13.32,248 90 top
R641  [0805]  14.91,257.6 270 top
R642  [0805]  14.91,248 90 top
R643  [0805]  10.12,248 90 top
R644  [0805]  11.71,257.6 270 top
R645  [0805]  11.71,248 90 top
R646  [0805]  6.92,248 90 top
R647  [0805]  8.52,257.6 270 top
R648  [0805]  8.52,248 90 top
R649  [0805]  166.88,248 90 top
R650  [0805]  168.47,257.6 270 top
R651  [0805]  168.47,248 90 top
R652  [0805]  163.67,248 90 top
R653  [0805]  165.27,257.6 270 top
R654  [0805]  165.27,248 90 top
R655  [0805]  160.47,248 90 top
R656  [0805]  162.07,257.6 270 top
R657  [0805]  162.07,248 90 top
R658  [0805]  157.27,248 90 top
R659  [0805]  158.88,257.6 270 top
R660  [0805]  158.88,248 90 top
R661  [0805]  154.07,248 90 top
R662  [0805]  155.67,257.6 270 top
R663  [0805]  155.67,248 90 top
R664  [0805]  150.88,248 90 top
R665  [0805]  152.47,257.6 270 top
R666  [0805]  152.47,248 90 top
R667  [0805]  147.67,248 90 top
R668  [0805]  149.27,257.6 270 top
R669  [0805]  149.27,248 90 top
R670  [0805]  144.47,248 90 top
R671  [0805]  146.07,257.6 270 top
R672  [0805]  146.07,248 90 top
R673  [0805]  141.27,248 90 top
R674  [0805]  142.88,257.6 270 top
R675  [0805]  142.88,248 90 top
R676  [0805]  138.07,248 90 top
R677  [0805]  139.67,257.6 270 top
R678  [0805]  139.67,248 90 top
R679  [0805]  134.88,248 90 top
R680  [0805]  136.47,257.6 270 top
R681  [0805]  136.47,248 90 top
R682  [0805]  131.67,248 90 top
R683  [0805]  133.27,257.6 270 top
R684  [0805]  133.27,248 90 top
R685  [0805]  128.47,248 90 top
R686  [0805]  130.07,257.6 270 top
R687  [0805]  130.07,248 90 top
R688  [0805]  125.28,248 90 top
R689  [0805]  126.88,257.6 270 top
R690  [0805]  126.88,248 90 top
R691  [0805]  122.08,248 90 top
R692  [0805]  123.67,257.6 270 top
R693  [0805]  123.67,248 90 top
R694  [0805]  118.88,248 90 top
R695  [0805]  120.48,257.6 270 top
R696  [0805]  120.48,248 90 top
R697  [0805]  115.67,248 90 top
R698  [0805]  117.28,257.6 270 top
R699  [0805]  117.28,248 90 top
R700  [0805]  112.48,248 90 top
R701  [0805]  114.08,257.6 270 top
R702  [0805]  114.08,248 90 top
R703  [0805]  109.28,248 90 top
R704  [0805]  110.88,257.6 270 top
R705  [0805]  110.88,248 90 top
R706  [0805]  106.08,248 90 top
R707  [0805]  107.67,257.6 270 top
R708  [0805]  107.67,248 90 top
R709  [0805]  102.88,248 90 top
R710  [0805]  104.48,257.6 270 top
R711  [0805]  104.48,248 90 top
R712  [0805]  99.67,248 90 top
R713  [0805]  101.28,257.6 270 top
R714  [0805]  101.28,248 90 top
R715  [0805]  96.48,248 90 top
R716  [0805]  98.08,257.6 270 top
R717  [0805]  98.08,248 90 top
R718  [0805]  93.28,248 90 top
R719  [0805]  94.88,257.6 270 top
R720  [0805]  94.88,248 90 top
S1  [TACTILE_SWITCH_SMD]  91.67,42.8 90 top
S2  [TACTILE_SWITCH_SMD]  5.31,42.8 90 top
S3  [TACTILE_SWITCH_SMD]  5.31,98.8 90 top
S4  [TACTILE_SWITCH_SMD]  91.67,98.8 90 top
S5  [TACTILE_SWITCH_SMD]  5.31,155.8 90 top
S6  [TACTILE_SWITCH_SMD]  91.67,155.8 90 top
S7  [TACTILE_SWITCH_SMD]  5.31,212.8 90 top
S8  [TACTILE_SWITCH_SMD]  91.67,212.8 90 top
S9  [TACTILE_SWITCH_SMD]  5.31,268.8 90 top
S10  [TACTILE_SWITCH_SMD]  91.67,268.8 90 top
U1  ARDUINO_SHIELDNO_SILK  [DUEMILANOVE_VIAS]  82.52,0.4 90 top
U2  ARDUINO_SHIELDNO_SILK  [DUEMILANOVE_VIAS]  168.88,0.4 90 top
U3  ARDUINO_SHIELDNO_SILK  [DUEMILANOVE_VIAS]  82.52,56.4 90 top
U4  ARDUINO_SHIELDNO_SILK  [DUEMILANOVE_VIAS]  168.88,56.4 90 top
U5  ARDUINO_SHIELDNO_SILK  [DUEMILANOVE_VIAS]  82.52,113.4 90 top
U6  ARDUINO_SHIELDNO_SILK  [DUEMILANOVE_VIAS]  168.88,113.4 90 top
U7  ARDUINO_SHIELDNO_SILK  [DUEMILANOVE_VIAS]  82.52,170.4 90 top
U8  ARDUINO_SHIELDNO_SILK  [DUEMILANOVE_VIAS]  168.88,170.4 90 top
U9  ARDUINO_SHIELDNO_SILK  [DUEMILANOVE_VIAS]  82.52,226.4 90 top
U10  ARDUINO_SHIELDNO_SILK  [DUEMILANOVE_VIAS]  168.88,226.4 90 top

## Library data of the parts
IC1-IC90 = 74xx-eu
LED1-LED240 = led
R1-R720 = SparkFun-Resistors
S1-S10 = SparkFun-Electromechanical; PROD_ID: SWCH-08247
U1-U10 = SparkFun-Boards